# EAGLE board Bottom Panel V5 - Notched (EAGLE 7.3.0)
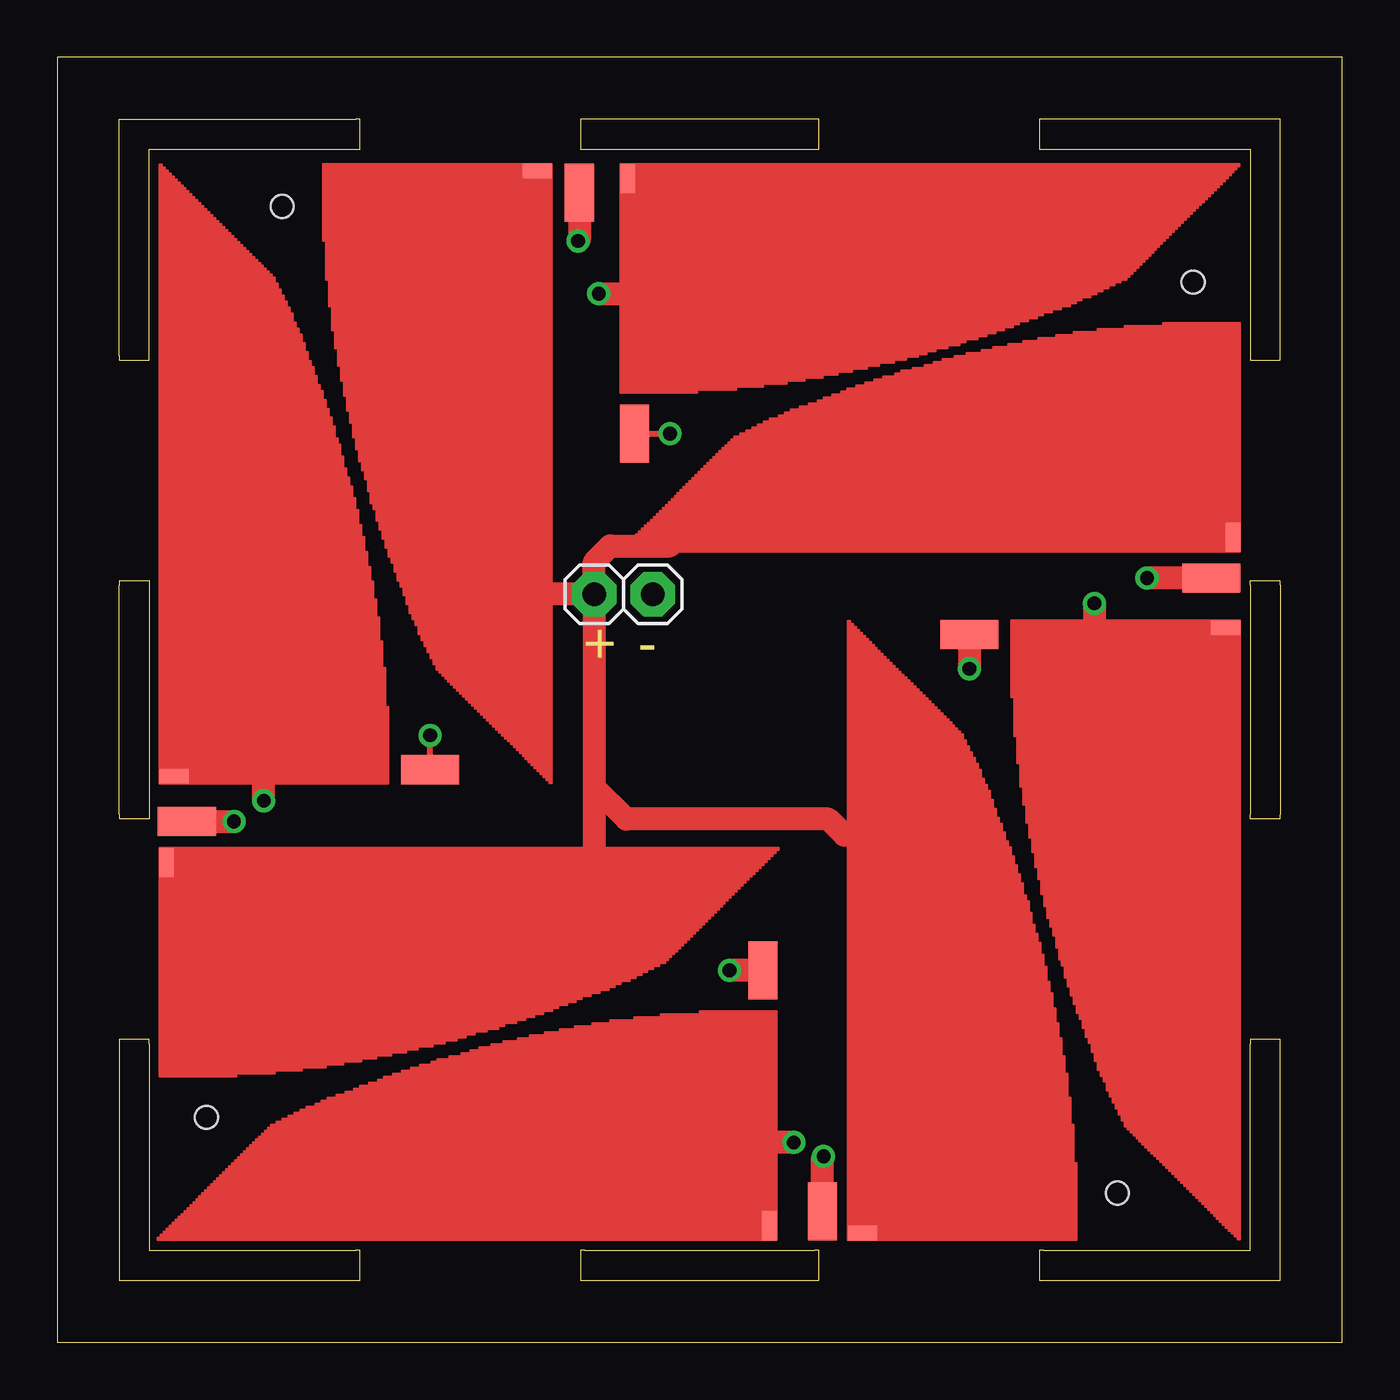
[diagram p0: board, top side]
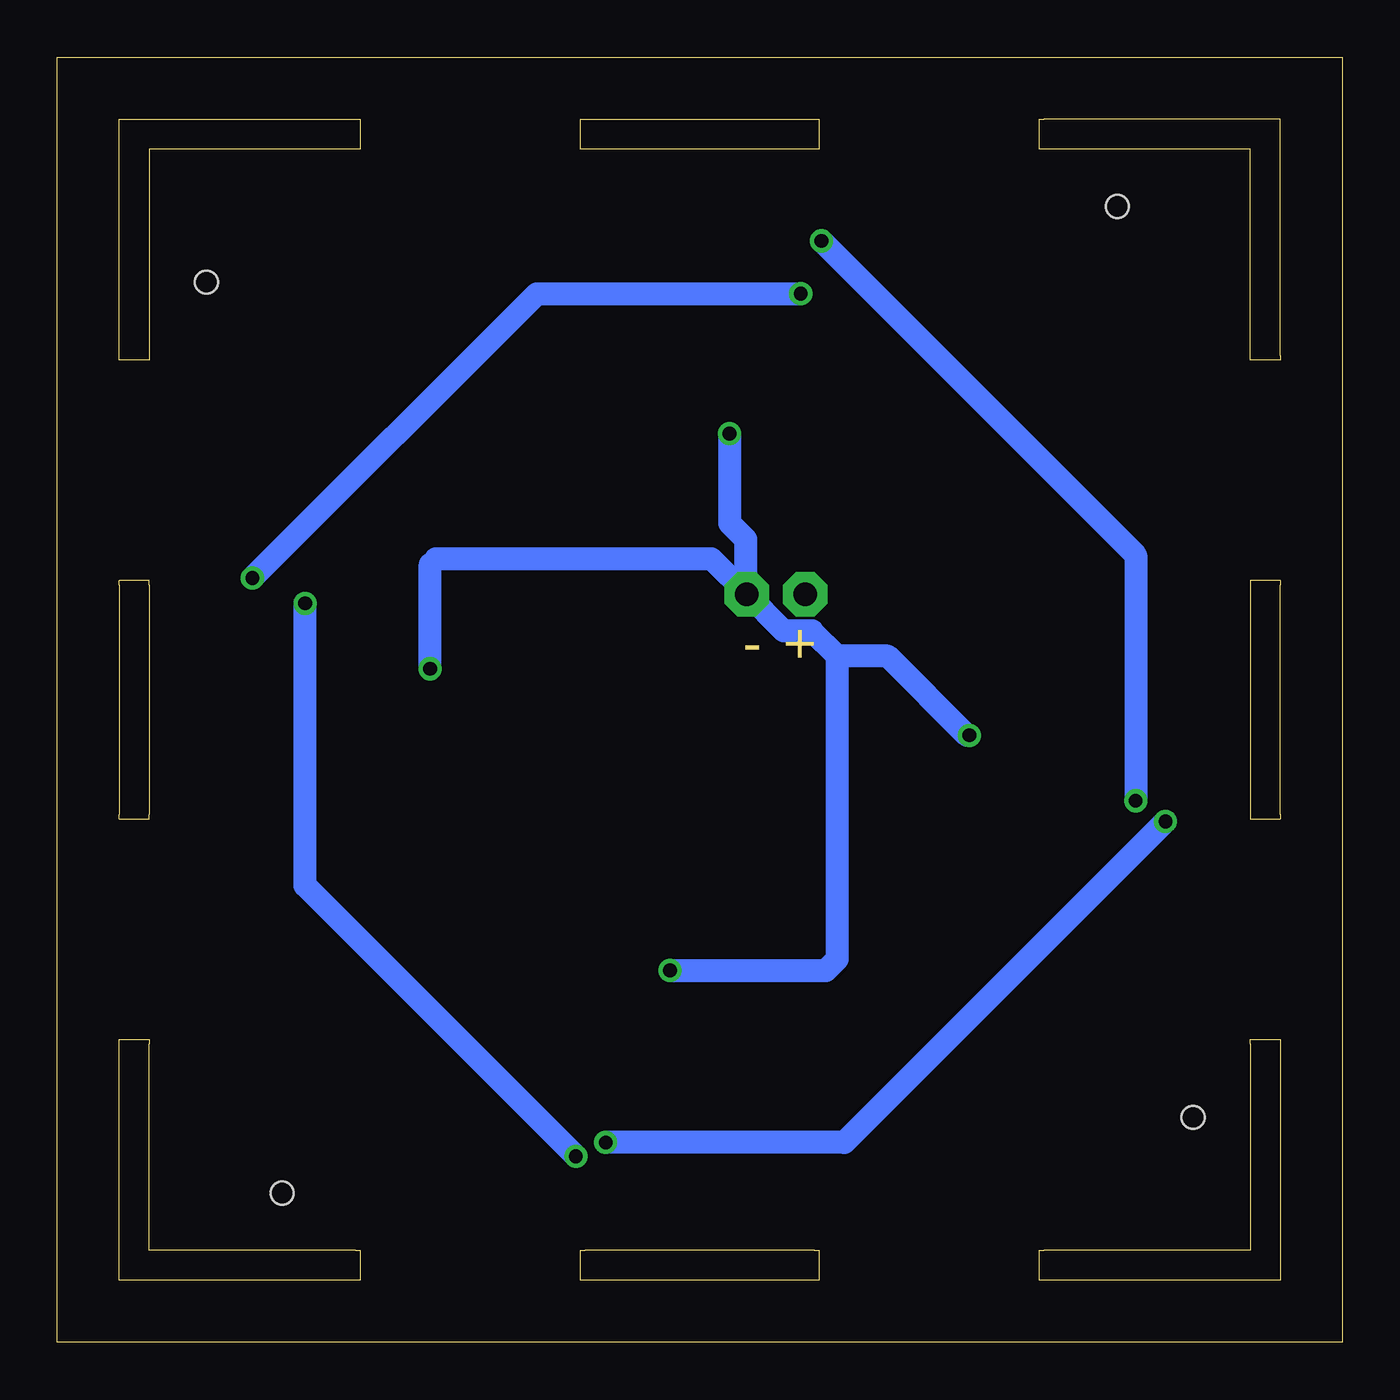
[diagram p1: board, bottom side, seen from below]

Size 56 x 56 mm. Coordinates in mm from the lower left corner, seen from the top.
Outline: 23,53.3 22.8,53.3 22.8,52 23,52 33,52 33.2,52 33.2,53.3 33,53.3 22.9,53.3
Outline: 4,43 4,52 13,52 13.2,52 13.2,53.3 13,53.3 2.7,53.3 2.7,43 2.7,42.8 4,42.8 4,43
Outline: 43,52 52,52 52,43 52,42.8 53.3,42.8 53.3,43 53.3,53.3 43,53.3 42.8,53.3 42.8,52 43,52
Outline: 4,33 4,23 4,22.8 2.7,22.8 2.7,23 2.7,33 2.7,33.2 4,33.2 4,33
Outline: 4,13 4,4 13,4 13.2,4 13.2,2.7 13,2.7 2.7,2.7 2.7,13 2.7,13.2 4,13.2 4,13
Outline: 23,4 33,4 33.2,4 33.2,2.7 33,2.7 23,2.7 22.8,2.7 22.8,4 23,4
Outline: 43,4 52,4 52,13 52,13.2 53.3,13.2 53.3,13 53.3,2.7 43,2.7 42.8,2.7 42.8,4 43,4
Outline: 52,33 52,23 52,22.8 53.3,22.8 53.3,23 53.3,33 53.3,33.2 52,33.2 52,33
Outline: 0,0 56,0 56,56 0,56 0,0
Copper layers (1*16): Top 0.035mm / dielectric 1.5mm / Bottom 0.035mm
Design rules "default": minimum track width 10mil, minimum drill 24mil, track to track 8mil, track to pad 8mil, pad to pad 8mil, via to via 8mil, smd to smd 8mil, copper to edge 40mil, drill to drill 8mil, minimum pad ring 10mil, minimum via ring 8mil, stop-mask expansion 4mil, vias tented up to drill 0mil, thermal gap 10mil
Holes 1 mm at 6.5,9.8 46.2,6.5 49.5,46.2 9.8,49.5

## Footprints (pad centres in the part's own frame; a part is rotated, then mirrored left to right if it is on the bottom)
TRISOLX = smd 1.27 x 0.635: P$1 0.584,0.26
SMD1,27-2,54 = smd 1.27 x 2.54: 1 0,0
1X01 = drill 1.016 pad 1.93 octagon: 1 0,0

## Placement (x,y rotation side)
E$1  [TRISOLX]  21.5,51.3 180 top
E$2  [TRISOLX]  31.3,4.5 90 top
E$3  [TRISOLX]  4.5,21.5 270 top
E$4  [TRISOLX]  51.5,31.4 180 top
E$5  [TRISOLX]  34.5,4.5 0 top
E$6  [TRISOLX]  24.6,51.3 270 top
E$7  [TRISOLX]  51.5,34.5 90 top
E$8  [SMD1,27-2,54]  5.65,22.7 90 top
E$9  [SMD1,27-2,54]  16.25,24.95 90 top
E$10  [SMD1,27-2,54]  50.3,33.3 90 top
E$11  [SMD1,27-2,54]  25.15,39.6 180 top
E$12  [SMD1,27-2,54]  30.75,16.2 180 top
E$13  [SMD1,27-2,54]  39.75,30.85 90 top
E$14  [SMD1,27-2,54]  22.75,50.1 180 top
E$15  [SMD1,27-2,54]  33.35,5.7 180 top
E$16  [1X01]  23.4,32.6 0 top
E$17  [1X01]  25.95,32.6 0 top
E$19  [TRISOLX]  4.5,24.4 0 top

## Library data of the parts
E$1-E$7 E$19 = trisolx
E$8-E$15 = wirepad
E$16 E$17 = adafruit

## Nets
S$1: E$9.1 E$11.1 E$12.1 E$13.1 E$17.1
S$3: E$6.P$1 E$10.1
S$4: E$1.P$1 E$3.P$1 E$5.P$1 E$7.P$1 E$16.1
S$5: E$14.1 E$19.P$1
S$8: E$2.P$1 E$8.1
S$10: E$4.P$1 E$15.1

## Tracks (layer width: path | path; a pad name or v marks a point on that pad's centre or on a via)
S$1  (via drill 0.6)
  Top 0.254: E$9.1 v16.25,26.45 | E$11.1 v26.7,39.6
  Top 1: E$12.1 v29.3,16.2 | E$13.1 v39.75,29.35
  Bottom 0.254: v16.25,26.45 16.35,26.45 | 26,32.65 E$17.1 | 39.75,33.9 39.5,34.15
  Bottom 1: v29.3,16.2 22.5,16.2 22,16.7 22,29.9 | 22,29.9 23.1,31 24.35,31 E$17.1 27.5,34.15 39.5,34.15 | 16.35,26.45 19.8,29.9 22,29.9 | v26.7,39.6 26.7,35.7 26,35 26,32.65 | v39.75,29.35 39.75,33.9
S$3  (via drill 0.6)
  Top 0.254: 25.3,45.7 25.3,50.27 E$6.P$1
  Top 1: E$10.1 v47.5,33.3 | v23.6,45.7 25.3,45.7
  Bottom 1: v47.5,33.3 35.1,45.7 v23.6,45.7
S$4
  Top 0.254: 20.9,32.6 20.8,32.7 20.8,50.92 E$1.P$1 | 26.7,34.7 26.8,34.8 33.3,34.8 33.7,35.2 37.1,35.2 39,37.1 E$7.P$1 | 22,20.7 4.97,20.7 E$3.P$1 | E$5.P$1 35.08,21.72 34.7,22.1 | 23.4,32 E$16.1
  Top 1: E$16.1 20.9,32.6 | E$16.1 23.4,34 24.1,34.7 26.7,34.7 | E$16.1 23.4,24.2 | 23.4,24.2 23.4,20.3 23.5,20.2 22.5,20.2 22,20.7 | 34.7,22.1 34.3,22.1 33.6,22.8 24.8,22.8 23.4,24.2
S$5  (via drill 0.6)
  Top 0.254: 22.75,48.05 v22.7,48 | 9,24.5 9.1,24.6 5.14,24.6 E$19.P$1
  Top 1: E$14.1 22.75,48.05 | v9,23.6 9,24.5
  Bottom 1: v22.7,48 9,34.3 v9,23.6
S$8  (via drill 0.6)
  Top 0.254: 30.5,8.7 30.4,8.8 30.4,5.72 E$2.P$1
  Top 1: E$8.1 v7.7,22.7 | v32.1,8.7 30.5,8.7
  Bottom 1: v7.7,22.7 21.7,8.7 v32.1,8.7
S$10  (via drill 0.6)
  Top 0.254: 33.35,8.05 v33.4,8.1 | 48.4,30.4 48.3,30.3 50.08,30.3 E$4.P$1
  Top 1: E$15.1 33.35,8.05 | v45.2,32.2 45.2,30.3 45.3,30.2 48.2,30.2 48.3,30.3
  Bottom 1: v45.2,32.2 45.2,19.9 v33.4,8.1

## Text on the board
Dimension: + | -